# Altium PCB PCB2.PcbDoc
Units mil, origin at the board's own origin, x right, y up, seen from the top; angles counter-clockwise.
Board outline 3149.61 x 1574.8 mil, 2 copper layers (Top Layer, Bottom Layer); 49 components, 34 nets, 218 pads, 68 vias.
Unrouted connection lines stored in the file: 11.
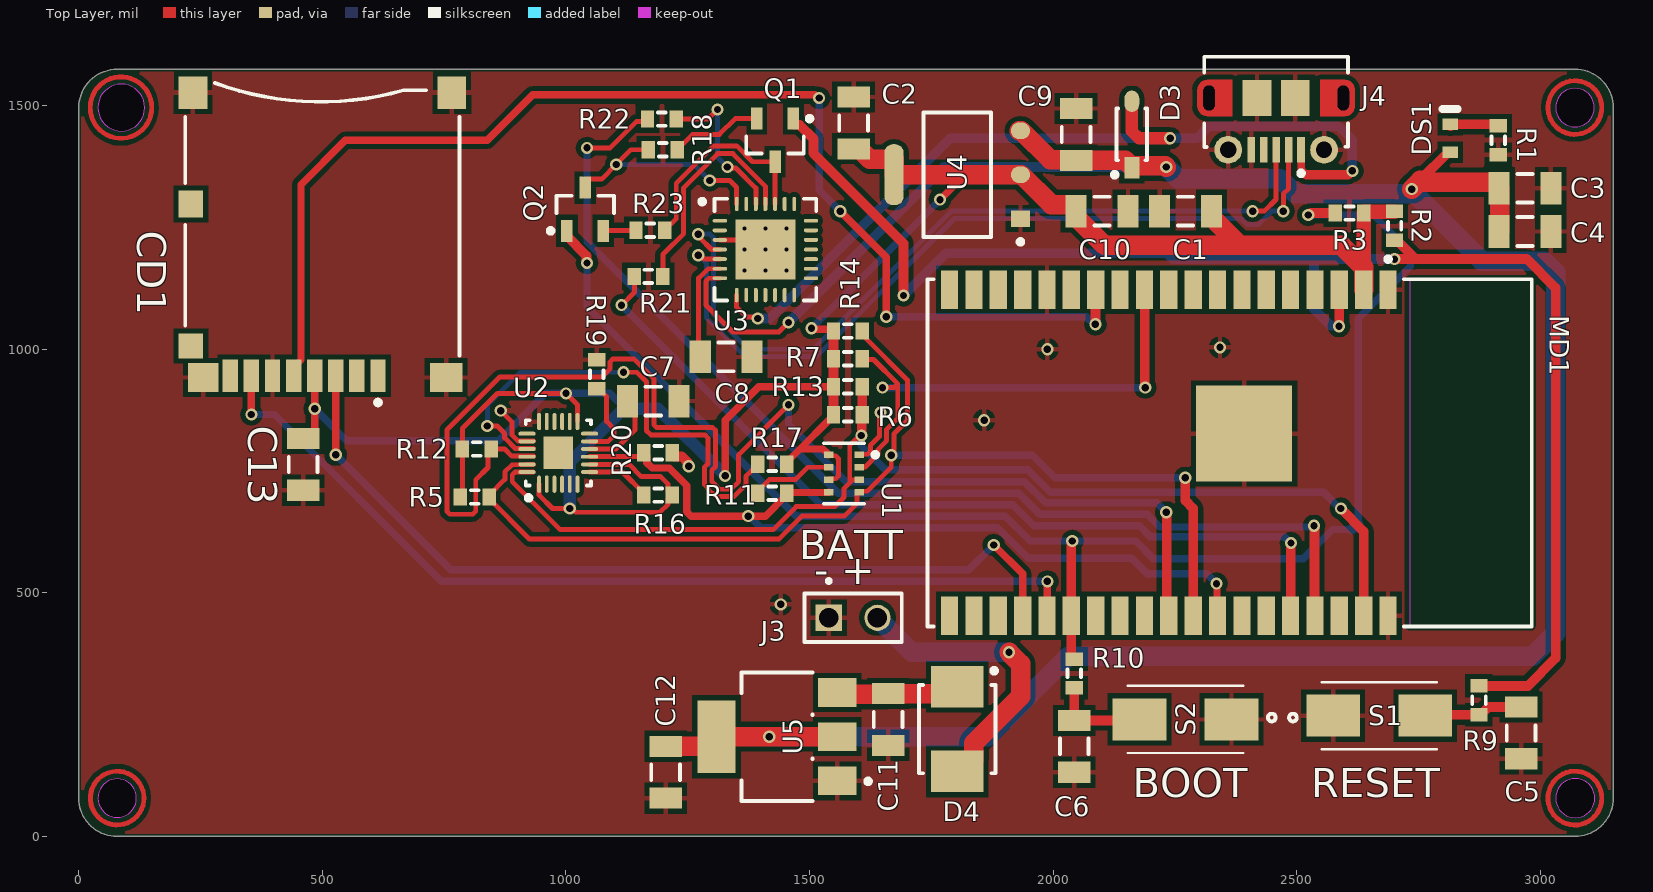
[diagram p0: Top Layer view]
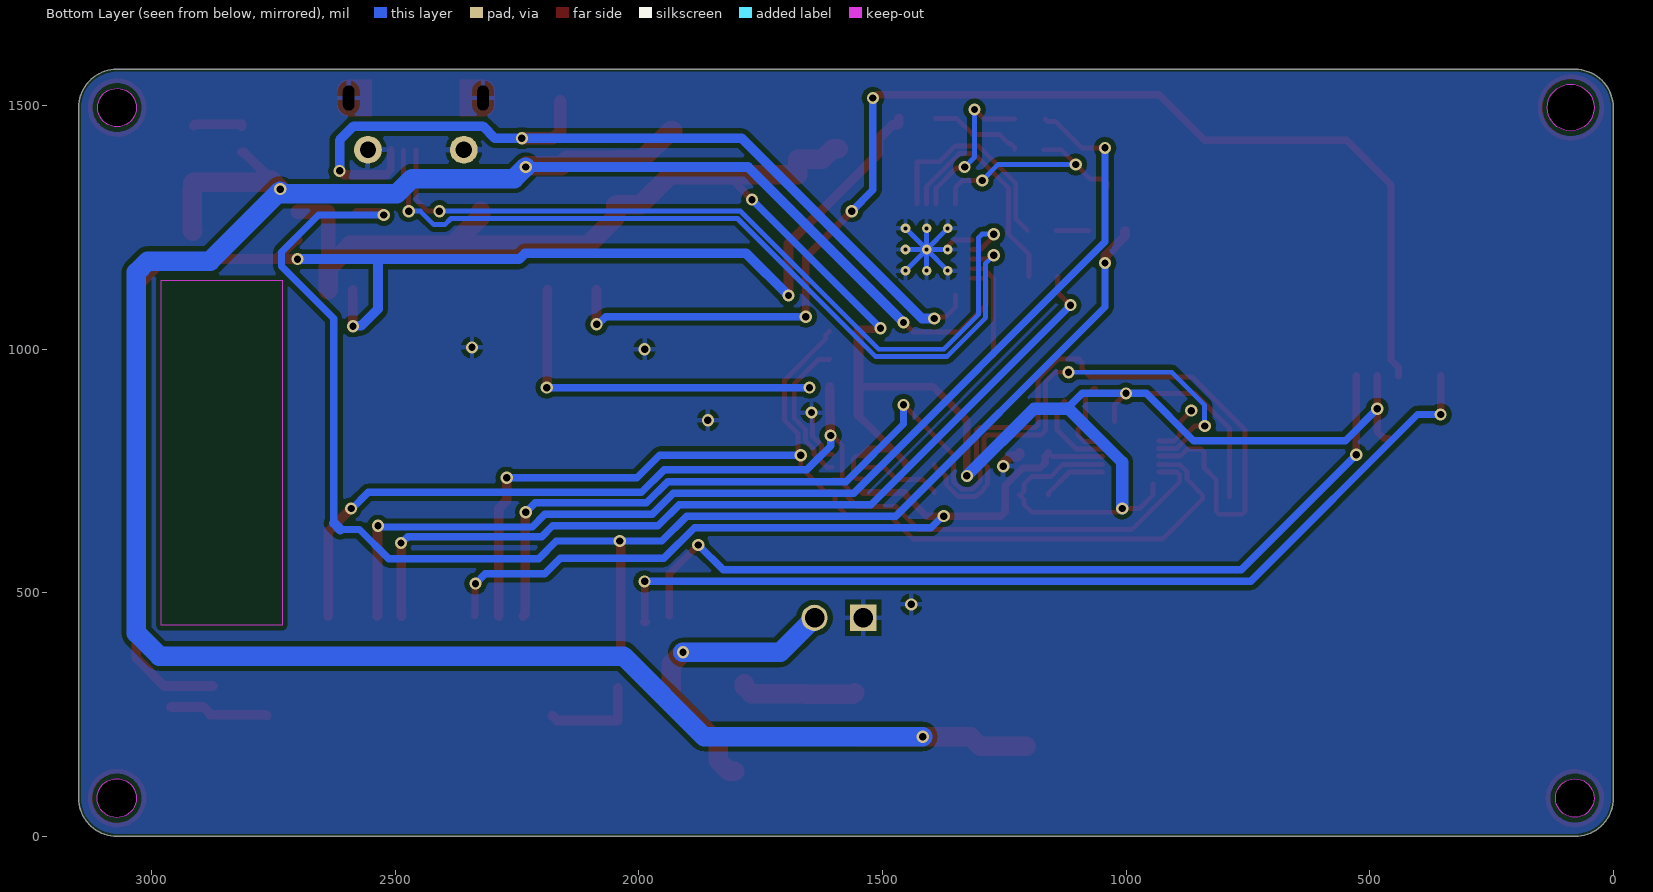
[diagram p1: Bottom Layer view, seen from below]

## Layer stack, top to bottom
Top Solder: solder mask 0.4, Solder Resist, Dk 3.5
Top Layer: signal copper 1.4
Dielectric 1: dielectric 12.6, FR-4, Dk 4.8
Bottom Layer: signal copper 1.4
Bottom Solder: solder mask 0.4, Solder Resist, Dk 3.5

## Board outline
0,78.74 ccw(c78.74,78.74) 78.74,0 3070.87,0 ccw(c3070.87,78.74) 3149.61,78.74 3149.61,1496.06 ccw(c3070.87,1496.06) 3070.87,1574.8 78.74,1574.8 ccw(c78.74,1496.06) 0,1496.06
cut-out: 3031.5,78.74 ccw(c3071.65,78.74) 3071.65,38.59 ccw(c3071.65,78.74) 3111.8,78.74 ccw(c3071.65,78.74) 3071.65,118.89 ccw(c3071.65,78.74)
cut-out: 3031.5,1496.06 ccw(c3071.06,1496.06) 3071.06,1456.5 ccw(c3071.06,1496.06) 3110.63,1496.06 ccw(c3071.06,1496.06) 3071.06,1535.63 ccw(c3071.06,1496.06)
cut-out: 39.37,78.74 ccw(c78.94,78.74) 78.94,39.17 ccw(c78.94,78.74) 118.5,78.74 ccw(c78.94,78.74) 78.94,118.31 ccw(c78.94,78.74)
cut-out: 39.37,1496.06 ccw(c87.43,1496.06) 87.43,1448.01 ccw(c87.43,1496.06) 135.48,1496.06 ccw(c87.43,1496.06) 87.43,1544.12 ccw(c87.43,1496.06)

## Design rules (kind name [scope] priority, off if disabled: settings)
BoardOutlineClearance [All] p1: gap=5 ignorepadtopadclearanceinfootprint=FALSE except(0: Arc-SplitContinuation Track-SplitContinuation SMDPad-SplitContinuation THPad-SplitContinuation Via-SplitContinuation Fill-SplitContinuation Poly-SplitContinuation Region-SplitContinuation Text-SplitContinuation)
Clearance 5V_Special [InNet('+5')] p1 off: gap=10 ignorepadtopadclearanceinfootprint=FALSE except(0: Arc-Hole Track-Hole SMDPad-Hole THPad-Hole Via-Hole Fill-Hole Poly-Hole Region-Hole Text-Hole; 20: Arc-Arc Arc-Track Track-Track)
Clearance Vbat_Special [InNet('Vbat')] p2 off: gap=10 ignorepadtopadclearanceinfootprint=FALSE except(0: Arc-Hole Track-Hole SMDPad-Hole THPad-Hole Via-Hole Fill-Hole Poly-Hole Region-Hole Text-Hole; 20: Arc-Arc Arc-Track Track-Track)
Clearance [All] p3: gap=10 ignorepadtopadclearanceinfootprint=FALSE except(0: Arc-Hole Track-Hole SMDPad-Hole THPad-Hole Via-Hole Fill-Hole Poly-Hole Region-Hole Text-Hole; 5: Arc-Arc Arc-Track Arc-SMDPad Track-Track Track-SMDPad SMDPad-SMDPad)
MinimumSolderMaskSliver MinimumSolderMaskSliver_1 [All] p1: minsoldermaskwidth=1
MinimumSolderMaskSliver [All] p2: minsoldermaskwidth=10
PolygonConnect [All] p1: connectstyle=Relief reliefconductorwidth=10 reliefentries=4 polygonreliefangle="90 Angle" airgapwidth=10
RoomDefinition ESP32WROVER [InComponentClass('ESP32WROVER')] p1: confinementstyle=ConfineOut formatcopy=TRUE lockcomponents=FALSE outline -102.36,1110.24 -744.09,1110.24 -744.09,1574.8 -102.36,1574.8
RoutingVias RoutingViasS [All] p1: holewidth=15 width=30 viastyle="Through Hole" minholewidth=10 minwidth=20 maxholewidth=50 maxwidth=70
RoutingVias [All] p2: holewidth=28 width=50 viastyle="Through Hole" minholewidth=28 minwidth=50 maxholewidth=28 maxwidth=50
SilkToSolderMaskClearance SilkToSolderMaskClearance_1 [IsPad] p1: minsilkscreentomaskgap=3 clearancetoexposedcopper=TRUE
SilkToSolderMaskClearance [IsPad] p2: minsilkscreentomaskgap=10 clearancetoexposedcopper=TRUE
SolderMaskExpansion [All] p1: expansion=4 istentingtop=FALSE
UnRoutedNet [All] p1: checkbadconnections=TRUE
Width [All] p1: maxlimit=100 minlimit=10 preferedwidth=20
27 further rules are at their usual default settings.

## Components (designator, comment, footprint, x,y, rotation, side; value= is the part's Value field where it differs from the comment)
C1 "Cap Semi" C1206 2271.82,1283.46 r0 top value=100uF
C2 "Cap Semi" C1206 1590.55,1464.57 r270 top value=1uF
C3 "Cap Semi" C1206 2968.5,1330.54 r180 top value=100uF
C4 "Cap Semi" C1206 2968.5,1241.79 r180 top value=1uF
C5 "Cap Semi" C1206 2960.63,212.6 r90 top value=1nF
C6 "Cap Semi" C1206 2043.31,185.04 r90 top value=1nF
C7 "Cap Semi" C1206 1179.13,893.7 r180 top value=0.1uF
C8 "Cap Semi" C1206 1328.74,984.25 r180 top value=1uF
C9 "Cap Semi" C1206 2047.24,1440.94 r270 top value=10uF
C10 "Cap Semi" C1206 2100.39,1283.46 r180 top value=10uF
C11 "Cap Semi" C1206 1661.42,240.16 r90 top value=10uF
C12 "Cap Semi" C1206 1204.72,131.89 r90 top value=10uF
C13 "Cap Semi" C1206 460.63,763.78 r270 top value=100nF
CD1 "502774-0891" MOLX-502774-0891_V 500,1236.22 r180 top
D3 "MBR0520LT1G" FP-425-04-IPC_B 2161.42,1440.94 r90 top
D4 "MBRS120T3" ONSC-SMB-2-403A-03_H_V 1803.15,220.47 r270 top
DS1 "TLMS1000-GS08" VISH-TLMS1000_V 2814.96,1433.07 r90 top
J3 "MTSW-101-09-G-D-235" SAMTEC_MTSW-101-09-G-D-235 1539.37,448.82 r270 top
J4 "105017-0001" USB-MICRO-B_V 2457.68,1462.6 r180 top
MD1 "ESP32-WROVER-I" FP-ESP32-WROVER-I-MFG 2362.2,787.4 r270 top locked
Q1 "QNPN" SOT-23B_N 1429.13,1429.13 r270 top
Q2 "QNPN" SOT-23B_N 1039.37,1287.4 r90 top
R1 "Res3" J1-0603 2913.39,1429.13 r90 top value=1K
R2 "Res3" J1-0603 2700.79,1253.71 r270 top value=12K
R3 "Res3" J1-0603 2608.27,1279.53 r180 top value=5K
R5 "Res3" J1-0603 812.99,696.85 r180 top value=10K
R6 "Res3" J1-0603 1578.74,865.81 r180 top value=10K
R7 "Res3" J1-0603 1578.74,980.31 r180 top value=10K
R9 "Res3" J1-0603 2874.02,279.53 r270 top value=470
R10 "Res3" J1-0603 2043.31,334.65 r270 top value=470
R11 "Res3" J1-0603 1423.23,704.72 r0 top value=10K
R12 "Res3" J1-0603 816.93,795.28 r0 top value=10K
R13 "Res3" J1-0603 1578.74,923.06 r180 top value=10K
R14 "Res3" J1-0603 1578.74,1037.57 r180 top value=10K
R16 "Res3" J1-0603 1188.98,700.79 r180 top value=10K
R17 "Res3" J1-0603 1423.23,763.78 r180 top value=10K
R18 "Res3" J1-0603 1198.82,1409.45 r180 top value=12K
R19 "Res3" J1-0603 1062.99,948.82 r90 top value=10K
R20 "Res3" J1-0603 1188.98,787.4 r0 top value=10K
R21 "Res3" J1-0603 1169.29,1149.61 r0 top value=470
R22 "Res3" J1-0603 1196.85,1472.44 r0 top value=470
R23 "Res3" J1-0603 1173.23,1244.09 r0 top value=12K
S1 "147873-2" SW_147873-2 2669.29,248.03 r0 top
S2 "147873-2" SW_147873-2 2271.65,240.16 r180 top
U1 "BMP280" FP-BMP280-MFG 1570.87,745.08 r0 top
U2 "MPU-9250" INSE-QFN-24-1700X1540TP_M 984.25,787.4 r90 top locked
U3 "CP2102-GM" SLAB-QFN-28-3125x3125TP_L 1409.45,1204.72 r0 top
U4 "AMS1117-3.3" FP-AMS1117-IPC_C 1803.15,1358.27 r180 top
U5 "NCP1117ST50T3G" FP-318H-MFG 1433.07,204.72 r180 top

## Footprints (in the part's own frame and the unit in brackets; to place one, negate y for a bottom-side part, rotate by r counter-clockwise, add the part's x,y. Pads: shape width x height; smd on the part's side, far side on the other; paste and mask are expansions set on the pad)
C1206 [mm] "Chip Capacitor, Body 3.2x1.6mm, IPC High Density"
  rect 1.1x1.7 smd: 1(-1.35,0) 2(1.35,0)
  silkscreen extent -0.4,-0.75 0.4,0.75, body extent -1.7,-0.9 1.7,0.9, height 1.3
FP-318H-MFG [mm]
  rect 2x1.5 smd paste+0 mask+0: 1(-3.15,2.3) 2(-3.15,0) 3(-3.15,-2.3)
  rect 2x3.8 smd paste+0 mask+0: 4(3.15,0)
  silkscreen extent -4.88,-3.35 1.85,3.35, body extent -4.25,-3.68 4.25,3.68, height 0.25
FP-425-04-IPC_B [mm]
  rect 1.108x0.782 smd paste+0 mask+0: 1(-1.73,0)
  rrect100% 1.108x0.782 smd paste+0 mask+0: 2(1.73,0)
  silkscreen extent -2.22,-0.8 1.35,1.02, body extent -2.53,-1.05 2.53,1.05, height 0.25
FP-AMS1117-IPC_C [mm]
  rect 1.004x0.872 smd paste+0 mask+0: 1(-3.295,2.29)
  rrect100% 1.004x0.872 smd paste+0 mask+0: 2(-3.295,0) 3(-3.295,-2.29)
  rrect87% 1.004x3.182 smd paste+0 mask+0: 4(3.295,0)
  silkscreen extent -3.42,-3.25 1.75,3.62, body extent -3.9,-3.35 3.9,3.35, height 0.25
FP-BMP280-MFG [mm]
  rect 0.5x0.35 smd paste+0 mask+0: 1(0.8,0.975) 2(0.8,0.325) 3(0.8,-0.325) 4(0.8,-0.975) 5(-0.8,-0.975) 6(-0.8,-0.325) 7(-0.8,0.325) 8(-0.8,0.975)
  silkscreen extent -1.05,-1.58 1.75,1.58, body extent -1.55,-1.8 1.55,1.8, height 0.25
FP-ESP32-WROVER-I-MFG [mm]
  rect 2x0.9 smd paste+0 mask+0: 1(-8.5,8.26) 2(-8.5,6.99) 3(-8.5,5.72) 4(-8.5,4.45) 5(-8.5,3.18) 6(-8.5,1.91) 7(-8.5,0.64) 8(-8.5,-0.63) 9(-8.5,-1.9) 10(-8.5,-3.17) 11(-8.5,-4.44) 12(-8.5,-5.71) 13(-8.5,-6.98) 14(-8.5,-8.25) 15(-8.5,-9.52) 16(-8.5,-10.79) 17(-8.5,-12.06) 18(-8.5,-13.33) 19(-8.5,-14.6) 20(8.5,-14.6) 21(8.5,-13.33) 22(8.5,-12.06) 23(8.5,-10.79) 24(8.5,-9.52) 25(8.5,-8.25) 26(8.5,-6.98) 27(8.5,-5.71) 28(8.5,-4.44) 29(8.5,-3.17) 30(8.5,-1.9) 31(8.5,-0.63) 32(8.5,0.64) 33(8.5,1.91) 34(8.5,3.18) 35(8.5,4.45) 36(8.5,5.72) 37(8.5,6.99) 38(8.5,8.26)
  rect 5x5 smd paste+0 mask+0: 39(-1,0.76)
  Keep-Out Layer region: -9,9.4 9,9.4 9,15.7 -9,15.7
  Keep-Out Layer region: -9,9.4 9,9.4 9,15.7 -9,15.7
  silkscreen extent -10.22,-15.75 9.05,15.75, body extent -9.6,-15.85 9.6,15.85, height 0.25
INSE-QFN-24-1700X1540TP_M [mm] "QFN, 24-Leads, Body 3.1x3.1mm, Pitch 0.40mm, Thermal Pad 1.54x1.70mm, IPC Low Density"
  oval 0.9x0.2 smd: 1(-1.632,1) 2(-1.632,0.6) 3(-1.632,0.2) 4(-1.632,-0.2) 5(-1.632,-0.6) 6(-1.632,-1) 13(1.632,-1) 14(1.632,-0.6) 15(1.632,-0.2) 16(1.632,0.2) 17(1.632,0.6) 18(1.632,1)
  oval 0.2x0.9 smd: 7(-1,-1.632) 8(-0.6,-1.632) 9(-0.2,-1.632) 10(0.2,-1.632) 11(0.6,-1.632) 12(1,-1.632) 19(1,1.632) 20(0.6,1.632) 21(0.2,1.632) 22(-0.2,1.632) 23(-0.6,1.632) 24(-1,1.632)
  rect 1.7x1.54 smd: 25(0,0)
  silkscreen extent -2.47,-1.7 1.7,1.7, body extent -1.55,-1.55 1.55,1.55, height 1.05
J1-0603 [mm] "Chip Resistor, Body 1.6x0.8mm, IPC High Density"
  rect 0.7x0.9 smd: 1(-0.75,0) 2(0.75,0)
  silkscreen extent -0.2,-0.35 0.2,0.35, body extent -0.85,-0.48 0.85,0.48, height 0.9
MOLX-502774-0891_V [mm] "SMD, 14-Leads, Body 15x14.3mm, Pitch 1.1mm"
  rect 0.8x1.68 smd: 1(-2.9,7.385) 2(-1.8,7.385) 3(-0.7,7.385) 4(0.4,7.385) 5(1.5,7.385) 6(2.6,7.385) 7(3.7,7.385) 8(4.8,7.385)
  rect 1.29x1.3 smd: 9(6.855,5.825)
  rect 1.29x1.4 smd: 10(6.855,-1.575)
  rect 1.5x1.7 smd: 11(6.75,-7.375) 12(-6.75,-7.375)
  rect 1.7x1.5 smd: 13(-6.45,7.475)
  rect 1.6x1.5 smd: 14(6.21,7.475)
  silkscreen extent -7.15,-7.88 7.15,8.9, body extent -7.15,-8 7.15,8, height 1.78
ONSC-SMB-2-403A-03_H_V [mil] "Molded, 2-Leads, Body 4.6x3.95mm"
  rect 85x107.99 smd: 1(-87.01,0) 2(87.01,0)
  silkscreen extent -125,-79 91,81, body extent -91,-78 91,78, height 95
SAMTEC_MTSW-101-09-G-D-235 [mm]
  rect 1.37x1.37 hole 1.02: 01(0,0)
  round 1.37 hole 1.02: 02(0,2.54)
  silkscreen extent -2.02,-1.27 1.27,3.81
SLAB-QFN-28-3125x3125TP_L [mm] "QFN, 28-Leads, Body 5x5mm, Pitch 0.5mm, Thermal Pad 3.13x3.13mm, IPC High Density"
  oval 0.75x0.2 smd: 1(-2.375,1.5) 2(-2.375,1) 3(-2.375,0.5) 4(-2.375,0) 5(-2.375,-0.5) 6(-2.375,-1) 7(-2.375,-1.5) 15(2.375,-1.5) 16(2.375,-1) 17(2.375,-0.5) 18(2.375,0) 19(2.375,0.5) 20(2.375,1) 21(2.375,1.5)
  oval 0.2x0.75 smd: 8(-1.5,-2.375) 9(-1,-2.375) 10(-0.5,-2.375) 11(0,-2.375) 12(0.5,-2.375) 13(1,-2.375) 14(1.5,-2.375) 22(1.5,2.375) 23(1,2.375) 24(0.5,2.375) 25(0,2.375) 26(-0.5,2.375) 27(-1,2.375) 28(-1.5,2.375)
  rect 3.13x3.13 smd: 29(0,0)
  silkscreen extent -3.42,-2.65 2.65,2.65, body extent -2.5,-2.5 2.5,2.5, height 1
SOT-23B_N [mm] "SOT23, 3-Leads, Body 2.9x1.3mm, Pitch 0.95mm, Lead Span 2.4mm, IPC Medium Density"
  rect 1.15x0.6 smd: 1(-1.125,0.95) 2(-1.125,-0.95) 3(1.125,0)
  silkscreen extent -1.25,-1.5 0.7,1.93, body extent -0.7,-1.5 0.7,1.5, height 1.14
SW_147873-2 [mm]
  rect 2.8x2.2 smd: 1(-2.4,0) 2(2.4,0)
  silkscreen extent -4.7,-1.75 3,1.75
USB-MICRO-B_V [mm] "USB, MICRO B, Body 7.491x4.695 mm, Pitch 0.65 mm"
  rect 0.4x1.35 smd: 1(-1.3,1.35) 2(-0.65,1.35) 3(0,1.35) 4(0.65,1.35) 5(1.3,1.35)
  round 1.45 hole 0.85: 6(-2.5,1.35) 7(2.5,1.35)
  rrect50% 0x0 hole 0.6 slot 1.3 at 90 deg: 8(-3.5,-1.35) 11(3.5,-1.35)
  rect 1.5x1.9 smd: 9(-1,-1.35) 10(1,-1.35)
  Top Layer circle w0.5: c-3.6,-1.8 r0.25
  Top Layer circle w0.5: c-3.6,-0.9 r0.25
  Top Layer circle w0.5: c3.6,-1.8 r0.25
  Top Layer circle w0.5: c3.6,-0.9 r0.25
  Top Layer region: -3.6,-1.8 -3.6,-0.9 -4.1,-0.9 -4.1,-1.8
  Top Layer region: 3.6,-0.9 3.6,-1.8 4.1,-1.8 4.1,-0.9
  Top Layer region: 2.3,-0.4 2.3,-2.3 3.6,-2.3 3.6,-0.4
  Top Layer region: -2.3,-2.3 -2.3,-0.4 -3.6,-0.4 -3.6,-2.3
  silkscreen extent -3.75,-3.5 3.75,2.7, body extent -4.1,-3.9 4.1,1.5, height 2.67
VISH-TLMS1000_V [mm] "SMD, 2-Leads, Body 0.8x1.6mm"
  rect 0.6x0.8 smd: 1(-0.725,0) 2(0.725,0)
  silkscreen extent 1.52,-0.4 1.52,0.4, body extent -0.8,-0.4 0.8,0.4, height 0.65

## Part data
C1 C2 C3 C4 C5 C6 C7 C8 C9 C10 C11 C12 C13: "Capacitor (Semiconductor SIM Model)", LatestRevisionDate=29-May-2009, LatestRevisionNote="IPC-7351 Footprint Added.", PackageDescription="Chip Capacitor", PackageReference=C1206, Published=8-Jun-2000, Publisher="Altium Limited"
CD1: library part CMP-2000-05248-1, "Micro SD Memory Card Connector, 0.5 A, 10 V (DC), -25 to 85 degC, 8-Pin SMT, RoHS, Tape and Reel", Manufacturer=Molex, Standard Package=1, 3D Model=502774-0891.stp, Card Type=SecureDigital-microSD™, Catalog Drawings=502774-0891, Category=Connectors,Interconnects, Connector Type=ConnectorandEjector, Contact Finish=Gold, Contact Finish Thickness=20µin(0.51µm), Datasheet URL=https://datasheet.ciiva.com/1104/1499551-1104671.pdf, Datasheet Version="Rev. D, 04/2004", Ejector Side=-, Family=MemoryConnectors-PCCardSockets, Features=Switch, Height Above Board="0.071\"(1.80mm)", Manufacturer URL=http://www.molex.com/, Mounting Feature=Reverse-Bottom, Mounting Type=SurfaceMount,RightAngle, Number of Positions=10(8+2), Online Catalog=microSD™Series, Other Names=WM24066DKR, Packaging=Digi-Reel, RoHS Information=502774-0891CertofCompliance, Series=502774, Insertion, Removal Method=PushIn,PushOut
D3: library part CMP-1055-00425-2, "DIODE SCHOTTKY 20V 500MA SOD123", Average Rectified Current=500mA, Case/Package=SOD-123-2, Forward Voltage=385mV, Max Forward Surge Current (Ifsm)=5.5A, Max Operating Temperature=125°C, Max Repetitive Reverse Voltage (Vrrm)=20V, Max Reverse Leakage Current=250uA, Min Operating Temperature=-65°C, Package Quantity=3000, Contact Plating=Tin, Current Rating=500mA, Element Configuration=Single, Forward Current=500mA, Height=1.12mm, Lead Free="Lead Free", Length=2.69mm, Max Reverse Voltage (DC)=20V, Max Surge Current=5.5A, Number of Pins=2, Output Current=500mA, Packaging="Tape and Reel", Peak Non-Repetitive Surge Current=5.5A, Peak Reverse Current=250uA, Polarity=Standard, Radiation Hardening=No, REACH SVHC="No SVHC", Termination=SMD/SMT, Voltage Rating (DC)=20V, Width=1.6mm
D4: library part CMP-1055-00352-1, "Schottky Power Rectifier, 2-Pin SMB, Tape and Reel", Manufacturer="On Semiconductor", ComponentLink1Description="Manufacturer URL", ComponentLink1URL=http://www.onsemi.com/, ComponentLink2Description=Datasheet, ComponentLink2URL=http://www.onsemi.cn/pub_link/Collateral/MBRS120T3-D.PDF, ComponentLink3Description="Package Specification", ComponentLink3URL=http://www.onsemi.com/pub_link/Collateral/1SMB5913BT3-D.PDF, Configuration=Single, DatasheetVersion="Rev. 7", Mounting Technology="Surface Mount", PackageDescription="2-Pin Small Molded Package, J-Bend Lead, Body 4.33 x 3.625 mm", PackageReference=SMB-2-403A-03_H, PackageVersion="Rev. H, 05/2011", Packing="Tape and Reel", PartNumber=MBRS120T3, RoHS=FALSE, IFSM Max (A)=40
DS1: library part CMP-2000-07254-1, "Low Current LED, 40 mW, 1.8 V, -40 to 100 degC, 2-Pin SMD (0603), RoHS, Tape and Reel", Forward Current If=2mA, Forward Voltage=1.8V, LED Colour=Red, Manufacturer=Vishay, Package Description="2-Pin Surface Mount Device, Body 1.6 x 0.8 mm", Package Reference=TLMS1000, Automotive Qualification Standard=AEC-Q100, Bulb Size=1.6mmx0.8mm, Datasheet URL=https://datasheet.ciiva.com/5798/1698881-5798337.pdf, Datasheet Version="Rev. 1.7, 02/2011", LED Mounting=SMD, Lens Shape=Rectangular, Luminous Intensity=4mcd, Manufacturer URL=http://www.vishay.com/, Mounting Technology=SurfaceMount, MSL=MSL2-1year, Packaging=CutTape, Product Range=-, SVHC=ToBeAdvised, Viewing Angle=80°, Wavelength Typ=636nm
J3: Package=None, Availability=Unavailable, MF="{'manufacturer': u'Samtec'}", MP=MTSW-101-09-G-D-235, Price=None
J4: library part CMP-2000-05827-1, "Micro-USB B Receptacle, Right Angle, Bottom Mount, Surface Mount, with Solder Tabs, -30 to 85 degC, 5-Pin USB, RoHS, Tape and Reel", Manufacturer=Molex, Package Description="5-Leads USB, Micro B, Body 7.5 x 5 mm, Pitch 0.65 mm", Package Reference=MICRO-B, Package Version="Rev. F, 12/2012", Standard Package=1, Voltage - Max=30V, 3D Model=105017-0001.stp, Catalog Drawings=1050170001, Category=Connectors,Interconnects, Circuits=5, Connector Type=USB-microB, Datasheet URL=http://www.molex.com/elqNow/elqRedir.htm?ref=http://www.molex.com/webdocs/datasheets/pdf/en-us/1050170001_IO_CONNECTORS.pdf, Datasheet Version=03/2016, Family=USB,DVI,HDMIConnectors, Featured Product=Micro-USBConnectorsUSBConnectors, Features=Shielded,SolderRetention, Gender=Receptacle, Manufacturer URL=http://www.molex.com/, Mating Products=WM17145-ND-CABLEMICROUSBBTOSTDA1.0MWM17147-ND-CABLEMICROUSBBTOSTDA2.0MWM17146-ND-CABLEMICROUSBBTOSTDA1.5M, Mounting Technology=SurfaceMount, Mounting Type=BoardCutout,SurfaceMount,RightAngle, Number of Contacts=5, Online Catalog=Molex-MicroUSB, Other Names=WM1399DKR, Package URL=http://www.molex.com/pdm_docs/sd/1050170001_sd.pdf, Packaging=Digi-Reel®, PCN Assembly/Origin=ResinSupplier21/Oct/2015, RoHS Information=1050170001CertofCompliance, Series=-, Specifications=-, Ingress Protection=-
MD1: library part CMP-194065-000001-1, "SMD MODULE, ESP32-D0WDQ6, 32MBIT", Manufacturer=Espressif, Max Frequency=2484MHz, Max Supply Voltage=3.6V, Min Supply Voltage=2.3V, Nominal Supply Current=500mA, Temperature="-40°C to +85°C", Temperature Range High=+85°C, Temperature Range Low=-40°C, Automotive=No, Category=UNK, ComponentLink2Description=Datasheet, ComponentLink2URL=https://www.espressif.com/sites/default/files/documentation/esp32-wrover_datasheet_en.pdf, Data Rate=150Mbits/s, Device Class L1="Integrated Circuits (ICs)", Device Class L2="RF Semiconductors and Devices", Device Class L3=Transceivers, Digikey Description="SMD MODULE, ESP32-D0WDQ6, 32MBIT", Height=3.4mm, Lead Free=Yes, Manufacturer Part Number=ESP32-WROVER-I, Number Of Adc Channels=16, Number Of Gpio=20, Octopart=https://octopart.com/esp32-wrover-i-espressif+systems-89171349, Package=ESP32-WROVER-I, RoHS=TRUE, Sensitivity=-98dBm, Interface=I2C,SPI,UART,I2S,Other
Q1 Q2: "NPN Bipolar Transistor", LatestRevisionDate=29-May-2009, LatestRevisionNote="IPC-7351 Footprint Added.", PackageDescription="3-Pin SOT-23 Package 0.95 mm Pitch, 2.4 mm Lead Span", PackageReference=SOT-23B, PackageVersion=Aug-1999, Published=8-Jun-2000, Publisher="Altium Limited"
R1 R2 R3 R5 R6 R7 R9 R10 R11 R12 R13 R14 R16 R17 R18 R19 R20 R21 R22 R23: "Resistor", LatestRevisionDate=29-May-2009, LatestRevisionNote="IPC-7351 Footprint Added.", PackageDescription="Chip Resistor", PackageReference=J1-0603, Published=8-Jun-2000, Publisher="Altium Limited"
S1 S2: "SWITCH TACTILE SPST-NO 0.05A 24V", Package=None, Availability=Unavailable, MF="{'manufacturer': u'TE Connectivity'}", MP=147873-2, Price=None
U1: library part CMP-2000-05076-3, "SENSOR PRESSURE ABS", Case/Package=SMD/SMT, Max Operating Temperature=85°C, Min Operating Temperature=-40°C, Operating Pressure=15.95PSI, Lead Free="Lead Free", Max Pressure=290.08PSI, Number of Pins=8, Output Type=SPI, Port Style="No Port", Pressure Type=Absolute, Termination=SMD/SMT
U2: library part CMP-2100-03657-1, "9-axis MotionTracking device, 2.4 to 3,6 V, -40 to 85 degC, 24-Pin QFN, RoHS, Tape and Reel", Case/Package=QFN, Manufacturer=InvenSense, Max Operating Temperature=85degC, Max Supply Voltage=3.6V, Min Operating Temperature=-40degC, Min Supply Voltage=2.4V, Package Description="24-Pin Quad Flat No-lead Package, Body 3 x 3 mm, Pitch 0.4 mm", Package Quantity=1, Package Reference=QFN-24, Datasheet URL=http://datasheet.octopart.com/MPU-9250-InvenSense-datasheet-21859386.pdf, Datasheet Version="Rev. 1.0, 01/2014", Height=1mm, Length=3.1mm, Manufacturer URL=http://www.invensense.com/, Mount=SurfaceMount, RoHSCompliant=true, Width=3.1mm
U3: library part CMP-0511-00012-1, "Single-Chip USB to UART Bridge, 1024 Bytes EEPROM, -40 to 85 degC, 28-pin QFN, Tube", Manufacturer="Silicon Labs", Code_JEDEC=MO-220, Code_IPC=J-STD-020C, ComponentLink1Description="Manufacturer URL", ComponentLink1URL=http://www.silabs.com/, ComponentLink2Description=Datasheet, ComponentLink2URL=http://www.silabs.com/Support%20Documents/TechnicalDocs/CP2102-9.pdf, ComponentLink3Description="Package Specification", ComponentLink3URL=http://www.silabs.com/Support%20Documents/TechnicalDocs/C8051T61x.pdf, DatasheetVersion="Rev. 1.5", EEPROM="1024 Bytes", Mounting Technology="Surface Mount", PackageDescription="28-Pin Quad-Flat No-Leads Package, Body 5 x 5 mm, Pitch 0.5 mm", PackageReference=QFN-28, PartNumber=CP2102-GM, Sub-Family="USB Bridges", Internal Oscillator=TRUE
U4: library part CMP-209535-000001-1, "LDO Voltage Regulators 1A, 3.3V", Dropout Voltage=1.1V, Manufacturer="Advanced Monolithic Systems", Max Junction Temp=+125°C, Max Power Dissipation=1.2W, Max Supply Voltage=15V, Nominal Supply Current=5mA, Output Current=1A, Output Voltage=3.3V, Package=AMS1117, Temperature="-40°C to +125°C", Temperature Range Low=-40°C, Automotive=No, Category=IC, ComponentLink2Description=Datasheet, ComponentLink2URL=http://www.advanced-monolithic.com/pdf/ds1117.pdf, Device Class L1="Integrated Circuits (ICs)", Device Class L2="Power Management ICs", Device Class L3="Voltage Regulators - Linear", Height=1.8mm, Lead Free=Yes, Manufacturer Part Number=AMS1117-3.3, Number Of Outputs=1, Octopart=https://octopart.com/ams1117-3.3-advanced+monolithic+systems-25899300, Output Type=Fixed, RoHS=TRUE, Standoff Height=0.64mm, Temperature Range High=+125°C, Ipc Land Pattern Name=SOT229P700X180-4
U5: library part CMP-0592-00001-4, "IC REG LINEAR 5V 1A SOT223", Case/Package=SOT-223, Dropout Voltage=1.2V, Max Operating Temperature=125°C, Max Output Current=1A, Max Input Voltage=20V, Min Operating Temperature=0°C, Min Input Voltage=3.5V, Nominal Output Voltage=5V, Output Voltage Accuracy=1%, Package Quantity=1, Power Rating=781mW, Quiescent Current=10mA, Input Bias Current=6mA, Accuracy=1%, Contact Plating=Tin, Halogen Free="Halogen Free", Height=1.69mm, Lead Free="Lead Free", Length=6.7mm, Min Current Limit=1A, Number Of Outputs=1, Number of Pins=4, Number of Regulators=1, Output Current=1A, Output Type=Fixed, Output Voltage=5V, Packaging="Tape and Reel", Polarity=Positive, Radiation Hardening=No, REACH SVHC="No SVHC", RoHS Compliant=Yes, Tolerance=1%, Width=3.7mm

## Via types
v1: diameter 25, hole 15, Top Layer to Bottom Layer, 59 vias
v2: diameter 19.68, hole 7.87, Top Layer to Bottom Layer, 9 vias

## Nets (pads, with @x,y where several pads share a name; then routed paths per layer and width w, separated by ;. In a path a pad name is that pad's centre, name@x,y a point inside that pad or via, vN(x,y) a via of type N, cw(c..) or ccw(c..) an arc to the next point about the centre after c; other vN are vias at no path point)
+3v3: C1.2 C2.2 C10.2 C13.1 CD1.4 MD1.2 R2.1 R3.1 R5.2 R6.2 R7.2 R12.1 R13.2 R14.2 R16.1 R17.1 U1.6 U1.8 U2.1 U2.8 U2.13 U4.2 U4.4 | length 5168.7
  Top Layer w10: R5.2@787.4,696.85 R12.1 787.4,837.34 859.51,909.45 v1(1000,909.45) 1023.62,885.83 U2.13 ; U2.1 944.88,700.79 972.44,673.23 v1(1007.87,673.23) 1011.93,673.23 1019.81,665.35 1192.91,665.35 1209.72,682.17 1209.72,692.01 R16.1 ; U2.8 1129.56,763.78 1154.7,738.64 1194.43,738.64 1209.72,723.35 1209.72,707.6 R16.1@1216.54,700.79 ; U1.6 1541.26,734.17 1553.35,734.17 1559.21,740.03 1559.21,775.72 1553.35,781.57 1541.26,781.57 U1.8
  Top Layer w15: C13.1 470.1,816.93 484.25,831.08 v1(484.25,877.95) CD1.4 ; v1(1326.77,740.16) 1326.77,854.33 1395.5,923.06 R13.2 ; R17.1 1452.76,767.72 1480.31,795.28 ; v1(1503.94,1043.31) 1505.85,1041.39 1545.39,1041.39 R14.2 ; U1.8 1537.64,783.46 1537.03,784.07 1537.03,785.88 1527.63,795.28 1480.31,795.28 ; R6.2 1549.21,861.87 1542.93,855.59 1540.63,855.59 1480.31,795.28 ; v1(1767.72,1307.09) 1803.15,1342.52 1803.15,1358.27
  Top Layer w20: R6.2 R13.2 R7.2 R14.2
  Top Layer w30: 2637.6,1169.86 2637.6,1279.33 R3.1 2637.8,1281.02 2639.02,1282.24 R2.1@2699.79,1282.24
  Top Layer w40: C2.2 1602.36,1411.42 1623.98,1389.8 1673.19,1389.8 1673.43,1389.57 U4.4 1803.15,1358.27 U4.2 1935,1358.27 1996.34,1296.93 2045.59,1296.93 2047.24,1295.28 C10.2 2047.24,1271.65 2105.47,1213.43 2383.19,1213.43 ; C1.2 2324.97,1271.65 2383.19,1213.43 ; MD1.2 2637.4,1168.17 2592.14,1213.43 2383.19,1213.43
  Bottom Layer w10: 1119.41,879.7 1121.16,877.95
  Bottom Layer w15: v1(484.25,877.95) 549.69,812.52 861.49,812.52 958.42,909.45 v1(1000,909.45) 1089.66,909.45 1119.41,879.7 ; v1(1503.94,1043.31) v1(1767.72,1307.09)
  Bottom Layer w25: v1(1007.87,673.23) 1007.87,768.16 1119.41,879.7 ; 1121.16,877.95 1188.98,877.95 v1(1326.77,740.16)
+5: C3.2 C4.2 C9.2 C12.2 D3.1 DS1.1 U3.7 U4.3 U5.2 U5.4 | length 5579.7
  Top Layer w10: U3.7 1293.38,1145.67 1287.4,1139.69 1287.4,1090.55 1342.52,1035.43 1437.01,1035.43 v1(1456.69,1055.12)
  Top Layer w20: 2753.44,1346.95 2811.02,1404.53 DS1.1
  Top Layer w40: C12.2 1299.21,185.04 1318.9,204.72 v1(1417.32,204.72) U5.2@1547.24,204.72 ; U4.3@1930.91,1448.43 U4.3 1935,1448.43 1993.98,1389.45 2045.59,1389.45 C9.2 2148.27,1387.8 2159.49,1376.57 2229.72,1376.57 v1(2232.28,1374.02) ; v1(2736.22,1328.74) 2753.94,1346.46 ; 2753.94,1342.52 2913.7,1342.52 2915.35,1340.87 C3.2 2916.33,1329.57 2916.33,1242.76 C4.2
  Bottom Layer w20: v1(1456.69,1055.12) 1775.59,1374.02 v1(2232.28,1374.02)
  Bottom Layer w40: v1(1417.32,204.72) 1866.14,204.72 2031.5,370.08 2984.25,370.08 3031.5,417.32 3031.5,1157.67 3008.06,1181.1 2879.92,1181.1 2736.22,1324.8 2730.31,1318.9 2497.11,1318.9 2465.62,1350.39 2255.91,1350.39 v1(2232.28,1374.02)
GND: C1.1 C2.1 C3.1 C4.1 C5.1 C6.1 C7.1 C8.1 C9.1 C10.1 C11.1 C12.1 C13.2 CD1.6 CD1.11 CD1.12 CD1.13 CD1.14 J3.01 J4.5 J4.6 J4.7 J4.8 J4.9 J4.10 J4.11 MD1.1 MD1.15 MD1.38 MD1.39 R1.1 R11.1 R19.2 R20.2 S1.1 S2.1 U1.1 U1.7 U2.18 U2.20 U3.3 U3.29 U4.1 U5.1 | length 922.9
  Top Layer w10: v1(866.14,874.02) 889.02,851.14 889.02,824.27 901.2,812.09 U2.20@933.07,812.09 ; U3.3 1352.83,1224.41 1366.14,1211.1 v2(1366.14,1204.72) ; R11.1 1393.7,708.66 1417.48,732.44 1470.99,732.44 1496.43,757.87 U1.7 ; U1.1 1603.42,784.52 1619.25,784.52 1625.11,790.38 1625.11,802.75 1643.29,820.93 1643.29,867.7 v1(1645.67,870.08)
  Top Layer w20: R20.2 1218.5,783.46 1222.28,779.69 1237.75,779.69 1251.01,766.43 1251.01,760.8 v1(1251.97,759.84)
  Bottom Layer w10: v2(1366.14,1161.42) v2(1409.45,1204.72) ; v2(1366.14,1204.72) v2(1409.45,1204.72) ; v2(1366.14,1248.03) v2(1409.45,1204.72) ; v2(1409.45,1161.42) v2(1409.45,1204.72) ; v2(1409.45,1248.03) v2(1409.45,1204.72) ; v2(1452.76,1161.42) v2(1409.45,1204.72) ; v2(1452.76,1204.72) v2(1409.45,1204.72) ; v2(1452.76,1248.03) v2(1409.45,1204.72)
  other v1: 1440.94,476.38 1858.27,854.33 1988.19,1000 2342.52,1003.94
NetC5_2: C5.2 R9.2 S1.2 | length 202.2
  Top Layer w20: S1.2 2765.75,250 R9.2 ; R9.2@2879.92,250 2877.95,250 2893.7,265.75 C5.2
NetC6_2: C6.2 R10.2 S2.2 | length 204.9
  Top Layer w20: R10.2 C6.2 2167.32,238.19 S2.2@2177.17,248.03
NetC7_2: C7.2 U2.10 | length 175.1
  Top Layer w10: U2.10 1102.36,795.28 1141.73,834.65 1141.73,877.95 C7.2
NetC8_2: C8.2 U3.6 | length 214.6
  Top Layer w10: C8.2 1272.4,987.44 1272.4,1145.91 1291.85,1165.35 U3.6
NetC11_2: C11.2 D4.1 U5.3 | length 240.2
  Top Layer w40: U5.3 1560.61,291.75 1659.86,291.75 C11.2 1769.15,293.31 1783.46,307.62 D4.1@1783.46,313.39
NetCD1_3: CD1.3 MD1.23 | length 1801.7
  Top Layer w15: v1(527.56,783.46) CD1.3 ; v1(1877.95,598.43) 1937.4,538.98 MD1.23
  Bottom Layer w15: v1(527.56,783.46) 763.78,547.24 1826.77,547.24 v1(1877.95,598.43)
NetCD1_5: CD1.5 MD1.13 | length 2554
  Top Layer w15: CD1.5 440.94,962.8 456,977.85 456,1337.89 547.24,1429.13 838.58,1429.13 931.57,1522.13 1510.6,1522.13 1516.98,1515.75 v1(1519.69,1515.75) ; v1(1562.99,1283.46) 1657.48,1188.98 v1(1657.48,1066.93)
  Top Layer w20: v1(2086.61,1051.18) 2087.01,1051.57 2087.01,1121.65 MD1.13
  Bottom Layer w15: v1(1519.69,1515.75) 1519.69,1326.77 v1(1562.99,1283.46) ; v1(1657.48,1066.93) 2068.16,1066.93 2083.91,1051.18 v1(2086.61,1051.18)
NetCD1_7: CD1.7 MD1.24 | length 1926.8
  Top Layer w15: v1(354.33,866.14) CD1.7 ; MD1.24 1987.8,453.15 1987.8,523.23 v1(1988.19,523.62)
  Top Layer w20: MD1.24@1987.4,440.55 MD1.24@1987.8,440.94
  Bottom Layer w15: v1(354.33,866.14) 401.57,866.14 744.09,523.62 v1(1988.19,523.62)
NetDS1_2: DS1.2 R1.2 | length 100.3
  Top Layer w20: DS1.2@2814.96,1457.68 DS1.2@2815.45,1458.17 ; DS1.2 2910.43,1461.61 R1.2
NetJ4_2: J4.2 U3.5 | length 1664.4
  Top Layer w10: v1(1271.65,1192.91) 1275.71,1192.91 1283.59,1185.04 U3.5 ; v1(2472.44,1283.46) 2472.44,1318.9 2483.27,1329.72 J4.2
  Bottom Layer w10: v1(1271.65,1192.91) 1288.15,1176.42 1288.15,1064.65 1367.8,985 1514.09,985 1797.55,1268.46 2385.56,1268.46 2398.06,1255.96 2420.84,1255.96 2448.34,1283.46 v1(2472.44,1283.46)
NetJ4_3: J4.3 U3.4 | length 1665.3
  Top Layer w10: v1(1271.65,1236.22) 1274.52,1233.35 1274.52,1228.93 1298.73,1204.72 U3.4 ; v1(2409.45,1283.46) 2433.55,1283.46 2457.44,1307.36 2457.44,1409.21 J4.3
  Bottom Layer w10: v1(1271.65,1236.22) 1295.28,1236.22 1303.15,1228.35 1303.15,1070.87 1374.02,1000 1507.87,1000 1791.34,1283.46 v1(2409.45,1283.46)
NetMD1_3: MD1.3 Q1.1 R2.2 R9.1 | length 3110.6
  Top Layer w20: Q1.1 1466.54,1462.6 1468.35,1460.79 1479.17,1460.79 1507.87,1432.09 1507.87,1402.3 1692.91,1217.26 v1(1692.91,1110.24) ; v1(2586.61,1047.24) 2587.01,1047.64 2587.01,1121.65 MD1.3 ; v1(2700.79,1185.04) 2743.53,1185.04 2743.7,1185.21 ; R2.2 2704.72,1224.18 2743.7,1185.21 ; R9.1 2974.41,309.06 3031.5,366.14 3031.5,1125.98 2972.27,1185.21 2743.7,1185.21
  Bottom Layer w20: v1(1692.91,1110.24) 1779.53,1196.85 2233.58,1196.85 2245.39,1185.04 2535.43,1185.04 ; v1(2586.61,1047.24) 2585.66,1048.2 2569.91,1048.2 2535.43,1082.68 2535.43,1185.04 ; v1(2700.79,1185.04) 2535.43,1185.04
NetMD1_11: MD1.11 R7.1 U1.2 | length 1080.2
  Top Layer w10: U1.2 1613.82,757.87 1640.11,784.16 1640.11,794.04 1658.29,812.22 1658.29,835.45 1681.1,858.27 1681.1,929.13 ; R7.1 1609.54,979.05 1631.19,979.05 1681.1,929.13 ; v1(1649.61,921.26) 1673.23,921.26 1681.1,929.13
  Top Layer w20: MD1.11 2188.19,1121.26 2188.19,922.05 v1(2188.98,921.26)
  Bottom Layer w15: v1(1649.61,921.26) v1(2188.98,921.26)
NetMD1_25: MD1.25 Q2.1 R3.2 R10.1 | length 3146.3
  Top Layer w20: Q2.1 1001.97,1232.28 1042.35,1191.9 1042.35,1178.12 v1(1043.31,1177.17) ; v1(2039.37,606.3) 2039.37,604.95 2037.4,602.98 2037.4,367.95 2041.18,364.17 R10.1 ; v1(2523.62,1275.59) 2524.98,1275.59 2528.91,1279.53 R3.2
  Bottom Layer w15: v1(1043.31,1177.17) 1043.31,1086.61 1472.44,657.48 1901.57,657.48 1952.76,606.3 v1(2039.37,606.3) 2169.29,606.3 2205.73,569.86 2513.46,569.86 2573.52,629.92 2612.89,629.92 ; v1(2523.62,1275.59) 2657.48,1275.59 2733.29,1199.78 2733.29,1170.3 2625.98,1062.99 2625.98,643.02
  Bottom Layer w20: 2612.89,629.92 2625.98,643.02
NetMD1_29: MD1.29 R12.2 U2.22 | length 2681.7
  Top Layer w10: U2.22@933.07,780.59 888.7,780.59 874.02,795.28 R12.2 839.94,788.76 839.94,757.27 814.96,732.28 814.96,667.28 809.1,661.42 761.76,661.42 755.91,667.28 755.91,834.65 864.33,943.07 1073.35,943.07 1090.71,960.42 1090.71,974.4 1096.57,980.26 1139.38,980.26 1180.35,939.28 1180.35,845.19 1186.21,839.33 1301.23,839.33 1307.09,833.47 1307.09,759.36 1299.27,751.55 1299.27,728.77 1307.09,720.95 1307.09,720.47 1314.96,712.6 1338.58,712.6 1354.33,728.35 1354.33,783.46 v1(1456.69,885.83)
  Top Layer w20: v1(2232.28,665.35) 2233.24,664.4 2233.24,456.92 MD1.29
  Bottom Layer w15: v1(1456.69,885.83) 1456.69,846.46 1574.8,728.35 1940.94,728.35 1984.25,685.04 2212.6,685.04 v1(2232.28,665.35)
NetMD1_30: MD1.30 R5.1 R14.1 U1.4 U2.23 | length 2311
  Top Layer w10: U2.23@933.07,763.78 U2.23 919.25,763.03 889.41,763.03 874.76,748.39 874.76,733.03 842.52,700.79 842.52,692.91 925.2,610.24 1437.01,610.24 1484.25,657.48 1570.87,657.48 1597.52,684.13 1597.52,704.8 1599.41,706.69 U1.4 1604.16,708.49 1618.51,708.49 1667.61,757.59 v1(1667.61,782.65) 1667.61,786.71 1673.29,792.39 1673.29,826.35 1700.79,853.85 1700.79,937.01 1617.05,1020.75 1617.05,1028.79 R14.1
  Top Layer w20: v1(2271.2,736.22) 2271.2,689.43 2287.4,673.23 MD1.30
  Bottom Layer w15: v1(1667.61,782.65) 1957.5,782.65 2003.94,736.22 v1(2271.2,736.22)
NetMD1_31: MD1.31 R11.2 R20.1 U1.5 U2.9 | length 1696.2
  Top Layer w10: U2.9 1049.25,780.28 1152.32,780.28 R20.1
  Top Layer w15: R20.1 1165.73,781.12 1165.73,767.34 1176.93,756.14 1212.32,756.14 1248.03,720.43 1248.03,666.27 1256.82,657.48 v1(1374.02,657.48) 1409.45,657.48 1452.76,700.79 R11.2 1454.11,706.08 1538.76,706.08 U1.5 ; v1(2335.33,519) 2336.37,517.96 2336.37,453.79 MD1.31
  Bottom Layer w15: v1(1374.02,657.48) 1376.72,657.48 1400.34,633.86 1885.83,633.86 1948.82,570.87 2161.42,570.87 2192.91,539.37 2314.96,539.37 v1(2335.33,519)
NetMD1_34: MD1.34 R21.1 | length 1796.6
  Top Layer w10: v1(1114.17,1090.55) 1140.75,1117.13 1140.75,1148.62 R21.1
  Top Layer w20: MD1.34 2487.8,453.15 2487.8,601.97 v1(2488.19,602.36)
  Bottom Layer w15: v1(1114.17,1090.55) 1523.62,681.1 1917.32,681.1 1960.63,637.8 2177.17,637.8 2199.61,615.35 2474.4,615.35 2487.39,602.36 v1(2488.19,602.36)
NetMD1_35: MD1.35 R22.1 | length 2260.8
  Top Layer w10: v1(1043.31,1413.39) 1090.55,1413.39 1144.4,1467.24 1160.15,1467.24 R22.1@1165.35,1472.44
  Top Layer w20: v1(2535.43,637.8) 2536.39,636.84 2536.39,453.77 MD1.35
  Bottom Layer w15: v1(1043.31,1413.39) 1043.31,1220.47 1559.06,704.72 1929.13,704.72 1972.44,661.42 2192.91,661.42 2218.98,635.35 2525.92,635.35 2526.45,635.88 2533.52,635.88 v1(2535.43,637.8)
NetMD1_37: MD1.37 R6.1 R13.1 U1.3 U2.24 | length 2375.1
  Top Layer w10: U2.24@932.76,748.03 U2.24 895.62,748.03 889.76,742.17 889.76,728.35 988.19,629.92 1425.2,629.92 1472.44,677.17 1551.18,677.17 1570.87,696.85 1570.87,714.77 1582.52,726.43 ; U1.3 1588.38,732.28 1582.52,726.43 ; v1(1606.3,822.83) 1602.24,822.83 1582.52,803.11 1582.52,726.43
  Top Layer w20: v1(1606.3,822.83) 1607.26,823.79 1607.26,864.79 R6.1 R13.1 ; v1@2589.59,672.27 v1(2590.55,673.23) 2637.4,626.38 MD1.37
  Bottom Layer w15: v1(1606.3,822.83) 1606.3,801.54 1637.61,770.23 1655.18,752.65 1948.13,752.65 1994.57,706.22 2555.58,706.22 2588.58,673.23 v1(2590.55,673.23)
NetQ1_2: Q1.2 R18.1 | length 192.2
  Top Layer w10: R18.1 1228.35,1413.39 1237.13,1422.17 1241.06,1422.17 1259.84,1440.94 1314.96,1440.94 1347.44,1473.43 Q1.2
NetQ1_3: Q1.3 R23.2 U3.24 | length 440.9
  Top Layer w10: R23.2 1226.38,1267.72 1226.38,1340.55 1303.15,1417.32 1350.39,1417.32 1382.87,1384.84 Q1.3 U3.24
NetQ2_2: Q2.2 R23.1 | length 67.3
  Top Layer w10: Q2.2 1077.76,1244.09 R23.1
NetQ2_3: Q2.3 R18.2 U3.28 | length 469
  Top Layer w10: Q2.3 1039.37,1342.52 1046.18,1349.33 1073.29,1349.33 v1(1103.35,1379.39) 1133.41,1409.45 R18.2 ; v1(1295.28,1346.46) 1336.06,1346.46 1350.39,1332.13 U3.28
  Bottom Layer w10: v1(1103.35,1379.39) 1262.34,1379.39 v1(1295.28,1346.46)
NetR16_2: R16.2 U2.7 | length 132.8
  Top Layer w10: U2.7 1116.14,748.03 1159.45,704.72 R16.2
NetR17_2: R17.2 U2.21 | length 1016.8
  Top Layer w10: v1(838.58,842.52) 858.58,842.52 874.02,827.09 874.02,818.05 895.73,796.34 U2.21@933.07,796.34 ; v1(1118.11,952.76) 1145.67,952.76 1165.35,933.07 1165.35,832.99 1174.02,824.33 1285.48,824.33 1291.34,818.47 1291.34,764.83 1284.27,757.76 1284.27,722.55 1291.34,715.49 1291.34,712.6 1299.37,704.57 1301.78,704.57 1308.75,697.6 1344.8,697.6 1369.33,722.13 1369.33,739.41 1380.98,751.06 1384.92,751.06 1393.7,759.84 R17.2
  Bottom Layer w10: v1(838.58,842.52) 838.58,885.35 905.99,952.76 v1(1118.11,952.76)
NetR19_1: R19.1 U2.11 | length 168.3
  Top Layer w10: U2.11 1086.61,811.02 1098.43,822.83 1098.43,836.94 1083.33,852.04 1083.33,902.89 1075.71,910.51 1066.93,919.29 R19.1
NetR21_2: R21.2 U3.25 | length 460.6
  Top Layer w10: R21.2 1198.82,1194.52 1241.38,1237.08 1241.38,1331.45 1311.38,1401.46 1342.64,1401.46 1409.45,1334.65 U3.25
NetR22_2: R22.2 U3.26 | length 326.3
  Top Layer w10: R22.2@1228.35,1472.44 1291.34,1472.44 v1(1311.02,1492.13) ; v1(1331.25,1373.96) 1333.06,1372.15 1348.33,1372.15 1389.76,1330.71 U3.26
  Bottom Layer w10: v1(1311.02,1492.13) 1311.02,1394.18 v1(1331.25,1373.96)
Vbat: D4.2 J3.02 | length 614.3
  Top Layer w40: D4.2 1814.65,133.46 1837.15,155.96 1837.15,191.48 1933.07,287.4 1933.07,354.33 v1(1909.45,377.95)
  Bottom Layer w40: J3.02 1710.24,377.95 v1(1909.45,377.95)
Vusb: D3.2 J4.1 U3.8 | length 1836.3
  Top Layer w10: U3.8 1350.39,1086.61 1371.15,1065.86 1390.83,1065.86 v1(1393.7,1062.99)
  Top Layer w15: J4.1 2509.23,1409.07 2509.23,1368.72 2519.69,1358.27
  Top Layer w20: 2519.69,1358.27 2604.95,1358.27 2612.82,1366.14 v1(2614.17,1366.14)
  Top Layer w25: D3.2 2161.42,1447.72 2176.06,1433.07 v1(2240.16,1433.07)
  Bottom Layer w20: v1(1393.7,1062.99) 1418.6,1062.99 1788.68,1433.07 v1(2240.16,1433.07) 2295.28,1433.07 2320.2,1457.99 2585.31,1457.99 2614.17,1429.13 v1(2614.17,1366.14)
pads on no net: CD1.1 CD1.2 CD1.8 CD1.9 CD1.10 J4.4 MD1.4 MD1.5 MD1.6 MD1.7 MD1.8 MD1.9 MD1.10 MD1.12 MD1.14 MD1.16 MD1.17 MD1.18 MD1.19 MD1.20 MD1.21 MD1.22 MD1.26 MD1.27 MD1.28 MD1.32 MD1.33 MD1.36 U2.2 U2.3 U2.4 U2.5 U2.6 U2.12 U2.14 U2.15 U2.16 U2.17 U2.19 U2.25 U3.1 U3.2 U3.9 U3.10 U3.11 U3.12 U3.13 U3.14 U3.15 U3.16 U3.17 U3.18 U3.19 U3.20 U3.21 U3.22 U3.23 U3.27
copper on no net: | length 1436.4
  Top Layer w10: 133.86,78.74 ccw(c78.74,78.74) 133.86,78.74 ; 149.73,1496.06 ccw(c86.61,1496.06) 149.73,1496.06 ; 3125.98,1496.06 ccw(c3070.87,1496.06) 3125.98,1496.06 ; 3126.12,78.74 ccw(c3070.87,78.74) 3126.12,78.74

## Polygon pours and split planes (outlines as drawn)
GND on Bottom Layer "GND_L02_P001" (solid, pour order 1): 0,78.74 ccw(c78.74,78.74) 78.74,0 3070.87,0 ccw(c3070.87,78.74) 3149.61,78.74 3149.61,1496.06 ccw(c3070.87,1496.06) 3070.87,1574.8 78.74,1574.8 ccw(c78.74,1496.06) 0,1496.06
GND on Top Layer "GND_L01_P000" (solid, pour order 0): 0,78.74 ccw(c78.74,78.74) 78.74,0 3070.87,0 ccw(c3070.87,78.74) 3149.61,78.74 3149.61,1496.06 ccw(c3070.87,1496.06) 3070.87,1574.8 78.74,1574.8 ccw(c78.74,1496.06) 0,1496.06

## Silkscreen, mask and mechanical layers (free items; w line width, h text height)
Top Overlay:
  text "BATT" at 1478.5,569.06 h60
  text "- +" at 1510,517.87 h60
  text "BOOT" at 2163.54,80.87 h60
  text "RESET" at 2529.69,80.87 h60

## Text inside footprints (layer, text, board x,y; h text height)
J4: Mechanical 1 "PCB EDGE" at 2649.61,1578.74 h11.81